# Altium PCB ANTS-MotorBoard.PcbDoc (part 3 of 3)
Units mm, origin at the board's own origin, x right, y up, seen from the top; angles counter-clockwise.
Board outline 50 x 50 mm, 2 copper layers (Top Layer, Bottom Layer); 2 components, 10 nets, 26 pads, 0 vias.
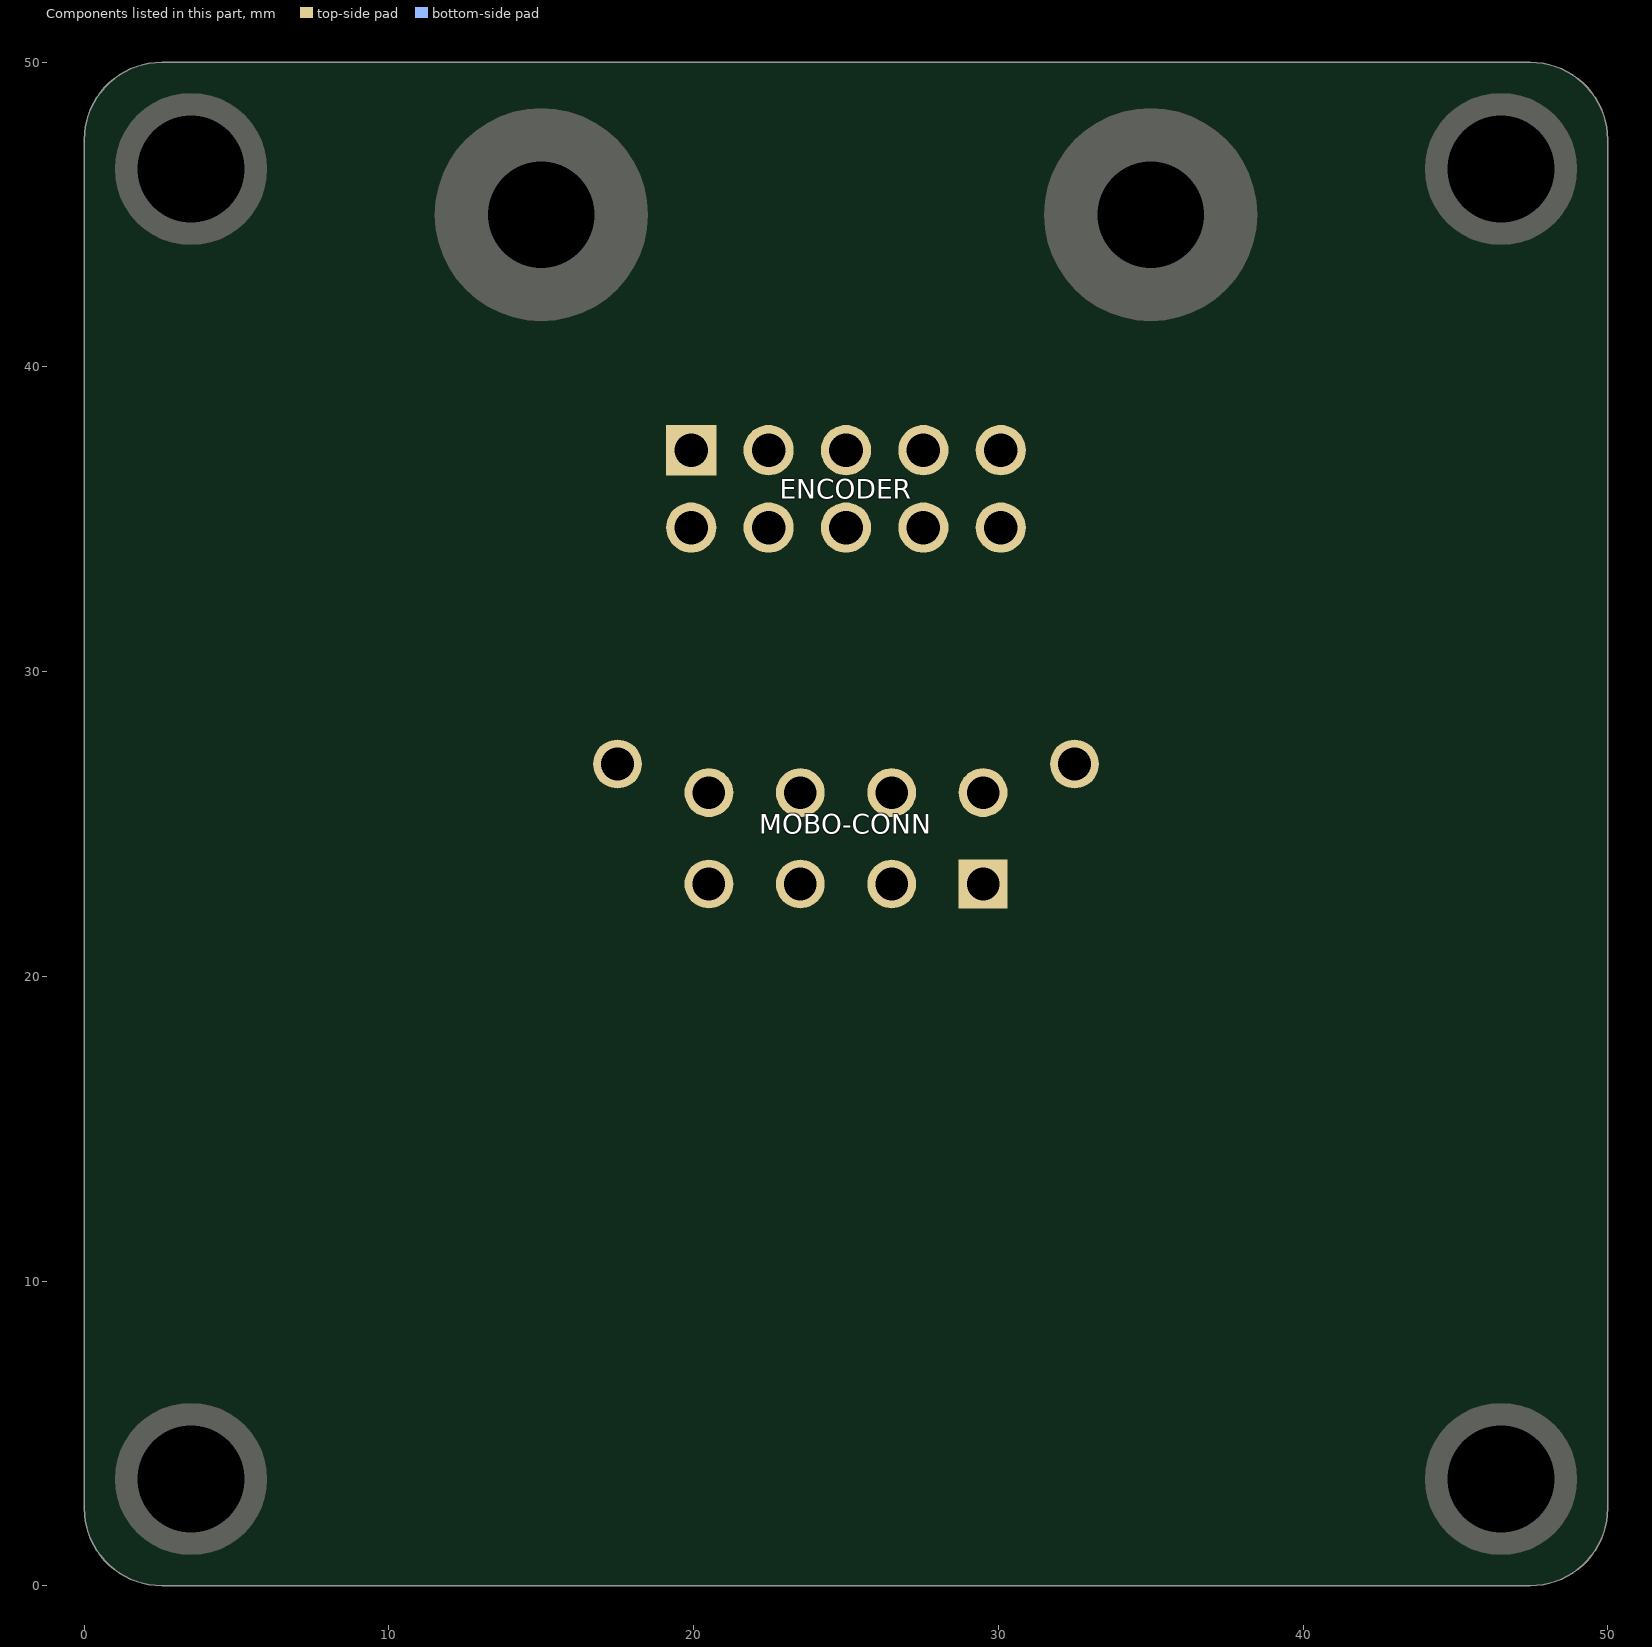
[diagram p3: the components of this part, seen from the top]

## Nets (pads, with @x,y where several pads share a name; then routed paths per layer and width w, separated by ;. In a path a pad name is that pad's centre, name@x,y a point inside that pad or via, vN(x,y) a via of type N, cw(c..) or ccw(c..) an arc to the next point about the centre after c; other vN are vias at no path point) (continued)
copper on no net: (continued)
  Top Layer w0.025: 27.892,2.794 28.223,2.794 ; 27.892,2.819 28.248,2.819 ; 27.892,8.509 28.832,8.509 ; 27.892,10.109 28.527,10.109 ; 27.892,10.135 28.527,10.135 ; 27.892,10.16 28.502,10.16 ; 27.892,10.185 28.502,10.185 ; 27.892,10.211 28.477,10.211 ; 27.892,10.236 28.477,10.236 ; 27.892,10.262 28.477,10.262 ; 27.892,10.287 28.451,10.287 ; 27.892,10.312 28.451,10.312 ; 27.918,2.057 28.35,2.057 ; 27.918,2.083 28.273,2.083 ; 27.918,2.845 28.299,2.845 ; 27.918,2.87 28.4,2.87 ; 27.918,8.484 28.832,8.484 ; 27.918,10.338 28.451,10.338 ; 27.918,10.363 28.451,10.363 ; 27.918,10.389 28.451,10.389 ; 27.918,10.414 28.451,10.414 ; 27.918,10.439 28.451,10.439 ; 27.943,2.007 29.086,2.007 ; 27.943,2.032 29.112,2.032 ; 27.943,2.896 29.086,2.896 ; 27.943,8.433 28.832,8.433 ; 27.943,8.458 28.832,8.458 ; 27.943,10.465 28.426,10.465 ; 27.943,10.49 28.426,10.49 ; 27.943,10.516 28.4,10.516 ; 27.943,10.541 28.4,10.541 ; 27.943,10.566 28.4,10.566 ; 27.943,10.592 28.4,10.592 ; 27.943,10.617 28.4,10.617 ; 27.943,10.643 28.4,10.643 ; 27.969,1.981 29.061,1.981 ; 27.969,2.921 29.086,2.921 ; 27.969,8.407 28.832,8.407 ; 27.994,1.956 29.035,1.956 ; 27.994,2.946 29.061,2.946 ; 27.994,2.972 29.035,2.972 ; 27.994,8.382 28.858,8.382 ; 28.019,1.93 29.01,1.93 ; 28.019,8.357 28.858,8.357 ; 28.019,12.573 28.35,12.573 ; 28.019,12.598 28.273,12.598 ; 28.019,12.624 28.197,12.624 ; 28.045,1.905 28.985,1.905 ; 28.045,2.997 29.01,2.997 ; 28.045,8.306 28.858,8.306 ; 28.045,8.331 28.858,8.331 ; 28.045,12.497 28.604,12.497 ; 28.045,12.522 28.502,12.522 ; 28.045,12.548 28.426,12.548 ; 28.045,12.649 28.096,12.649 ; 28.07,3.023 28.959,3.023 ; 28.07,8.28 28.858,8.28 ; 28.07,12.344 28.756,12.344 ; 28.07,12.37 28.756,12.37 ; 28.07,12.395 28.756,12.395 ; 28.07,12.421 28.756,12.421 ; 28.07,12.446 28.756,12.446 ; 28.07,12.471 28.68,12.471 ; 28.096,1.88 28.959,1.88 ; 28.096,3.048 28.934,3.048 ; 28.096,8.255 28.858,8.255 ; 28.096,12.294 28.781,12.294 ; 28.096,12.319 28.756,12.319 ; 28.121,1.854 28.908,1.854 ; 28.121,8.23 28.858,8.23 ; 28.121,12.192 28.807,12.192 ; 28.121,12.217 28.807,12.217 ; 28.121,12.243 28.781,12.243 ; 28.121,12.268 28.781,12.268 ; 28.146,3.073 28.883,3.073 ; 28.146,8.179 28.883,8.179 ; 28.146,8.204 28.858,8.204 ; 28.146,12.04 28.832,12.04 ; 28.146,12.065 28.832,12.065 ; 28.146,12.09 28.832,12.09 ; 28.146,12.116 28.832,12.116 ; 28.146,12.141 28.807,12.141 ; 28.146,12.167 28.807,12.167 ; 28.172,8.153 28.883,8.153 ; 28.172,11.963 28.858,11.963 ; 28.172,11.989 28.858,11.989 ; 28.172,12.014 28.832,12.014 ; 28.197,1.829 28.858,1.829 ; 28.197,8.128 28.883,8.128 ; 28.197,11.811 28.883,11.811 ; 28.197,11.836 28.883,11.836 ; 28.197,11.862 28.883,11.862 ; 28.197,11.887 28.883,11.887 ; 28.197,11.913 28.858,11.913 ; 28.197,11.938 28.858,11.938 ; 28.223,3.099 28.832,3.099 ; 28.223,8.077 28.883,8.077 ; 28.223,8.103 28.883,8.103 ; 28.223,11.76 28.908,11.76 ; 28.223,11.786 28.908,11.786 ; 28.248,8.052 28.883,8.052 ; 28.248,11.608 28.934,11.608 ; 28.248,11.633 28.934,11.633 ; 28.248,11.659 28.934,11.659 ; 28.248,11.684 28.934,11.684 ; 28.248,11.709 28.908,11.709 ; 28.248,11.735 28.908,11.735 ; 28.273,1.803 28.781,1.803 ; 28.273,8.001 28.883,8.001 ; 28.273,8.026 28.883,8.026 ; 28.273,11.532 28.959,11.532 ; 28.273,11.557 28.959,11.557 ; 28.273,11.582 28.959,11.582 ; 28.299,3.124 28.731,3.124 ; 28.299,7.976 28.883,7.976 ; 28.299,11.455 28.985,11.455 ; 28.299,11.481 28.959,11.481 ; 28.299,11.506 28.959,11.506 ; 28.324,11.303 29.01,11.303 ; 28.324,11.328 29.01,11.328 ; 28.324,11.354 29.01,11.354 ; 28.324,11.379 28.985,11.379 ; 28.324,11.405 28.985,11.405 ; 28.324,11.43 28.985,11.43 ; 28.35,7.925 28.883,7.925 ; 28.35,7.95 28.883,7.95 ; 28.35,11.227 29.01,11.227 ; 28.35,11.252 29.01,11.252 ; 28.35,11.278 29.01,11.278 ; 28.375,7.874 28.883,7.874 ; 28.375,7.899 28.883,7.899 ; 28.375,11.074 29.061,11.074 ; 28.375,11.1 29.061,11.1 ; 28.375,11.125 29.061,11.125 ; 28.375,11.151 29.035,11.151 ; 28.375,11.176 29.035,11.176 ; 28.375,11.201 29.035,11.201 ; 28.4,7.849 28.883,7.849 ; 28.4,11.024 29.061,11.024 ; 28.4,11.049 29.061,11.049 ; 28.426,7.823 28.908,7.823 ; 28.426,10.871 29.086,10.871 ; 28.426,10.897 29.086,10.897 ; 28.426,10.922 29.086,10.922 ; 28.426,10.947 29.086,10.947 ; 28.426,10.973 29.086,10.973 ; 28.426,10.998 29.061,10.998 ; 28.451,7.798 28.908,7.798 ; 28.451,10.795 29.112,10.795 ; 28.451,10.82 29.112,10.82 ; 28.451,10.846 29.112,10.846 ; 28.477,7.747 28.908,7.747 ; 28.477,7.772 28.908,7.772 ; 28.477,10.719 29.137,10.719 ; 28.477,10.744 29.137,10.744 ; 28.477,10.77 29.112,10.77 ; 28.502,7.722 28.908,7.722 ; 28.502,10.566 29.162,10.566 ; 28.502,10.592 29.162,10.592 ; 28.502,10.617 29.162,10.617 ; 28.502,10.643 29.137,10.643 ; 28.502,10.668 29.137,10.668 ; 28.502,10.693 29.137,10.693 ; 28.527,7.696 28.908,7.696 ; 28.527,10.465 29.188,10.465 ; 28.527,10.49 29.188,10.49 ; 28.527,10.516 29.188,10.516 ; 28.527,10.541 29.162,10.541 ; 28.553,7.671 28.908,7.671 ; 28.553,10.363 29.188,10.363 ; 28.553,10.389 29.188,10.389 ; 28.553,10.414 29.188,10.414 ; 28.553,10.439 29.188,10.439 ; 28.578,7.62 28.934,7.62 ; 28.578,7.645 28.934,7.645 ; 28.578,10.287 29.213,10.287 ; 28.578,10.312 29.213,10.312 ; 28.578,10.338 29.213,10.338 ; 28.604,7.595 28.934,7.595 ; 28.604,10.135 29.239,10.135 ; 28.604,10.211 29.239,10.211 ; 28.604,10.236 29.239,10.236 ; 28.604,10.262 29.239,10.262 ; 28.629,7.569 28.934,7.569 ; 28.629,10.033 29.264,10.033 ; 28.629,10.058 29.264,10.058 ; 28.629,10.084 29.264,10.084 ; 28.629,10.109 29.239,10.109 ; 28.629,10.16 29.239,10.16 ; 28.629,10.185 29.239,10.185 ; 28.654,2.87 29.112,2.87 ; 28.654,7.544 28.934,7.544 ; 28.654,9.982 29.289,9.982 ; 28.654,10.008 29.264,10.008 ; 28.68,2.057 29.112,2.057 ; 28.68,7.493 28.934,7.493 ; 28.68,7.518 28.934,7.518 ; 28.68,9.83 29.315,9.83 ; 28.68,9.855 29.315,9.855 ; 28.68,9.881 29.315,9.881 ; 28.68,9.906 29.289,9.906 ; 28.68,9.931 29.289,9.931 ; 28.68,9.957 29.289,9.957 ; 28.705,7.468 28.934,7.468 ; 28.705,9.779 29.315,9.779 ; 28.705,9.804 29.315,9.804 ; 28.731,2.845 29.137,2.845 ; 28.731,7.442 28.934,7.442 ; 28.731,9.627 29.366,9.627 ; 28.731,9.652 29.34,9.652 ; 28.731,9.677 29.34,9.677 ; 28.731,9.703 29.34,9.703 ; 28.731,9.728 29.34,9.728 ; 28.731,9.754 29.315,9.754 ; 28.756,2.083 29.137,2.083 ; 28.756,7.417 28.934,7.417 ; 28.756,9.55 29.366,9.55 ; 28.756,9.576 29.366,9.576 ; 28.756,9.601 29.366,9.601 ; 28.781,2.819 29.137,2.819 ; 28.781,7.366 28.934,7.366 ; 28.781,7.391 28.934,7.391 ; 28.781,9.474 29.366,9.474 ; 28.781,9.5 29.366,9.5 ; 28.781,9.525 29.366,9.525 ; 28.807,2.108 29.137,2.108 ; 28.807,7.341 28.959,7.341 ; 28.807,9.296 29.416,9.296 ; 28.807,9.322 29.416,9.322 ; 28.807,9.347 29.416,9.347 ; 28.807,9.373 29.391,9.373 ; 28.807,9.398 29.391,9.398 ; 28.807,9.423 29.391,9.423 ; 28.807,9.449 29.391,9.449 ; 28.832,2.134 29.162,2.134 ; 28.832,2.794 29.137,2.794 ; 28.832,7.315 28.959,7.315 ; 28.832,9.271 29.442,9.271 ; 28.858,2.159 29.162,2.159 ; 28.858,2.769 29.162,2.769 ; 28.858,7.264 28.959,7.264 ; 28.858,7.29 28.959,7.29 ; 28.858,9.093 29.467,9.093 ; 28.858,9.119 29.467,9.119 ; 28.858,9.144 29.442,9.144 ; 28.858,9.169 29.442,9.169 ; 28.858,9.195 29.442,9.195 ; 28.858,9.22 29.442,9.22 ; 28.858,9.246 29.442,9.246 ; 28.883,2.184 29.162,2.184 ; 28.883,2.21 29.188,2.21 ; 28.883,2.718 29.188,2.718 ; 28.883,2.743 29.162,2.743 ; 28.883,7.239 28.959,7.239 ; 28.883,9.042 29.467,9.042 ; 28.883,9.068 29.467,9.068 ; 28.908,2.235 29.188,2.235 ; 28.908,2.261 29.188,2.261 ; 28.908,2.667 29.188,2.667 ; 28.908,2.692 29.188,2.692 ; 28.908,8.89 29.493,8.89 ; 28.908,8.915 29.493,8.915 ; 28.908,8.941 29.493,8.941 ; 28.908,8.966 29.493,8.966 ; 28.908,8.992 29.493,8.992 ; 28.908,9.017 29.467,9.017 ; 28.934,2.286 29.188,2.286 ; 28.934,2.311 29.188,2.311 ; 28.934,2.337 29.188,2.337 ; 28.934,2.362 29.213,2.362 ; 28.934,2.388 29.213,2.388 ; 28.934,2.413 29.213,2.413 ; 28.934,2.438 29.213,2.438 ; 28.934,2.464 29.213,2.464 ; 28.934,2.489 29.213,2.489 ; 28.934,2.515 29.213,2.515 ; 28.934,2.54 29.213,2.54 ; 28.934,2.565 29.213,2.565 ; 28.934,2.591 29.188,2.591 ; 28.934,2.616 29.188,2.616 ; 28.934,2.642 29.188,2.642 ; 28.934,8.509 29.493,8.509 ; 28.934,8.534 29.493,8.534 ; 28.934,8.56 29.493,8.56 ; 28.934,8.585 29.493,8.585 ; 28.934,8.611 29.493,8.611 ; 28.934,8.636 29.493,8.636 ; 28.934,8.661 29.493,8.661 ; 28.934,8.687 29.493,8.687 ; 28.934,8.712 29.493,8.712 ; 28.934,8.738 29.493,8.738 ; 28.934,8.763 29.493,8.763 ; 28.934,8.788 29.493,8.788 ; 28.934,8.814 29.493,8.814 ; 28.934,8.839 29.493,8.839 ; 28.934,8.865 29.493,8.865 ; 28.959,8.407 29.493,8.407 ; 28.959,8.433 29.493,8.433 ; 28.959,8.458 29.493,8.458 ; 28.959,8.484 29.493,8.484 ; 28.985,7.95 29.493,7.95 ; 28.985,7.976 29.493,7.976 ; 28.985,8.001 29.493,8.001 ; 28.985,8.026 29.493,8.026 ; 28.985,8.052 29.493,8.052 ; 28.985,8.077 29.493,8.077 ; 28.985,8.103 29.493,8.103 ; 28.985,8.128 29.493,8.128 ; 28.985,8.153 29.493,8.153 ; 28.985,8.179 29.493,8.179 ; 28.985,8.204 29.493,8.204 ; 28.985,8.23 29.493,8.23 ; 28.985,8.255 29.493,8.255 ; 28.985,8.28 29.493,8.28 ; 28.985,8.306 29.493,8.306 ; 28.985,8.331 29.493,8.331 ; 28.985,8.357 29.493,8.357 ; 28.985,8.382 29.493,8.382 ; 29.01,7.823 29.493,7.823 ; 29.01,7.849 29.493,7.849 ; 29.01,7.874 29.493,7.874 ; 29.01,7.899 29.493,7.899 ; 29.01,7.925 29.493,7.925 ; 29.035,7.544 29.543,7.544 ; 29.035,7.569 29.543,7.569 ; 29.035,7.595 29.543,7.595 ; 29.035,7.62 29.518,7.62 ; 29.035,7.645 29.518,7.645 ; 29.035,7.671 29.518,7.671 ; 29.035,7.696 29.518,7.696 ; 29.035,7.722 29.518,7.722 ; 29.035,7.747 29.518,7.747 ; 29.035,7.772 29.518,7.772 ; 29.035,7.798 29.518,7.798 ; 29.061,7.239 29.543,7.239 ; 29.061,7.264 29.543,7.264 ; 29.061,7.29 29.543,7.29 ; 29.061,7.315 29.543,7.315 ; 29.061,7.341 29.543,7.341 ; 29.061,7.366 29.543,7.366 ; 29.061,7.391 29.543,7.391 ; 29.061,7.417 29.543,7.417 ; 29.061,7.442 29.543,7.442 ; 29.061,7.468 29.543,7.468 ; 29.061,7.493 29.543,7.493 ; 29.061,7.518 29.518,7.518 ; 29.086,7.188 29.543,7.188 ; 29.086,7.214 29.543,7.214 ; 29.112,6.731 29.543,6.731 ; 29.112,6.756 29.543,6.756 ; 29.112,6.782 29.543,6.782 ; 29.112,6.807 29.543,6.807 ; 29.112,6.833 29.543,6.833 ; 29.112,6.858 29.543,6.858 ; 29.112,6.883 29.543,6.883 ; 29.112,6.909 29.543,6.909 ; 29.112,6.934 29.543,6.934 ; 29.112,6.96 29.543,6.96 ; 29.112,6.985 29.543,6.985 ; 29.112,7.01 29.543,7.01 ; 29.112,7.036 29.543,7.036 ; 29.112,7.061 29.543,7.061 ; 29.112,7.087 29.543,7.087 ; 29.112,7.112 29.543,7.112 ; 29.112,7.137 29.543,7.137 ; 29.112,7.163 29.543,7.163 ; 29.137,6.579 29.569,6.579 ; 29.137,6.604 29.569,6.604 ; 29.137,6.629 29.543,6.629 ; 29.137,6.655 29.543,6.655 ; 29.137,6.68 29.543,6.68 ; 29.137,6.706 29.543,6.706 ; 29.162,6.198 29.569,6.198 ; 29.162,6.223 29.569,6.223 ; 29.162,6.248 29.569,6.248 ; 29.162,6.274 29.569,6.274 ; 29.162,6.299 29.569,6.299 ; 29.162,6.325 29.569,6.325 ; 29.162,6.35 29.569,6.35 ; 29.162,6.375 29.569,6.375 ; 29.162,6.401 29.569,6.401 ; 29.162,6.426 29.569,6.426 ; 29.162,6.452 29.569,6.452 ; 29.162,6.477 29.569,6.477 ; 29.162,6.502 29.569,6.502 ; 29.162,6.528 29.569,6.528 ; 29.162,6.553 29.569,6.553 ; 29.162,11.151 29.797,11.151 ; 29.162,11.176 29.67,11.176 ; 29.162,11.201 29.594,11.201 ; 29.162,11.227 29.493,11.227 ; 29.162,11.252 29.416,11.252 ; 29.162,11.278 29.34,11.278 ; 29.162,11.303 29.239,11.303 ; 29.188,6.02 29.569,6.02 ; 29.188,6.045 29.569,6.045 ; 29.188,6.071 29.569,6.071 ; 29.188,6.096 29.569,6.096 ; 29.188,6.121 29.569,6.121 ; 29.188,6.147 29.569,6.147 ; 29.188,6.172 29.569,6.172 ; 29.188,11.024 30.204,11.024 ; 29.188,11.049 30.128,11.049 ; 29.188,11.074 30.001,11.074 ; 29.188,11.1 29.95,11.1 ; 29.188,11.125 29.848,11.125 ; 29.213,5.74 29.594,5.74 ; 29.213,5.766 29.594,5.766 ; 29.213,5.791 29.594,5.791 ; 29.213,5.867 29.569,5.867 ; 29.213,5.893 29.569,5.893 ; 29.213,5.918 29.569,5.918 ; 29.213,5.944 29.569,5.944 ; 29.213,5.969 29.569,5.969 ; 29.213,5.994 29.569,5.994 ; 29.213,10.947 30.458,10.947 ; 29.213,10.973 30.382,10.973 ; 29.213,10.998 30.28,10.998 ; 29.239,5.436 29.594,5.436 ; 29.239,5.461 29.594,5.461 ; 29.239,5.486 29.594,5.486 ; 29.239,5.512 29.594,5.512 ; 29.239,5.537 29.594,5.537 ; 29.239,5.563 29.594,5.563 ; 29.239,5.588 29.594,5.588 ; 29.239,5.613 29.594,5.613 ; 29.239,5.639 29.594,5.639 ; 29.239,5.664 29.594,5.664 ; 29.239,5.69 29.594,5.69 ; 29.239,5.715 29.594,5.715 ; 29.239,5.817 29.594,5.817 ; 29.239,5.842 29.594,5.842 ; 29.239,10.719 30.991,10.719 ; 29.239,10.744 30.991,10.744 ; 29.239,10.77 30.966,10.77 ; 29.239,10.795 30.94,10.795 ; 29.239,10.82 30.89,10.82 ; 29.239,10.846 30.813,10.846 ; 29.239,10.871 30.686,10.871 ; 29.239,10.897 30.636,10.897 ; 29.239,10.922 30.534,10.922 ; 29.264,5.359 29.62,5.359 ; 29.264,5.385 29.62,5.385 ; 29.264,5.41 29.62,5.41 ; 29.264,10.668 31.042,10.668 ; 29.264,10.693 31.017,10.693 ; 29.289,4.978 29.645,4.978 ; 29.289,5.004 29.645,5.004 ; 29.289,5.029 29.62,5.029 ; 29.289,5.055 29.62,5.055 ; 29.289,5.08 29.62,5.08 ; 29.289,5.105 29.62,5.105 ; 29.289,5.131 29.62,5.131 ; 29.289,5.156 29.62,5.156 ; 29.289,5.182 29.62,5.182 ; 29.289,5.207 29.62,5.207 ; 29.289,5.232 29.62,5.232 ; 29.289,5.258 29.62,5.258 ; 29.289,5.283 29.62,5.283 ; 29.289,5.309 29.62,5.309 ; 29.289,5.334 29.62,5.334 ; 29.289,10.49 31.169,10.49 ; 29.289,10.516 31.169,10.516 ; 29.289,10.541 31.144,10.541 ; 29.289,10.566 31.118,10.566 ; 29.289,10.592 31.093,10.592 ; 29.289,10.617 31.067,10.617 ; 29.289,10.643 31.042,10.643 ; 29.315,4.928 29.67,4.928 ; 29.315,4.953 29.67,4.953 ; 29.315,10.389 31.245,10.389 ; 29.315,10.414 31.245,10.414 ; 29.315,10.439 31.22,10.439 ; 29.315,10.465 31.194,10.465 ; 29.34,4.902 29.67,4.902 ; 29.34,10.287 31.347,10.287 ; 29.34,10.312 31.321,10.312 ; 29.34,10.338 31.296,10.338 ; 29.34,10.363 31.271,10.363 ; 29.366,4.851 29.696,4.851 ; 29.366,4.877 29.696,4.877 ; 29.366,10.109 31.474,10.109 ; 29.366,10.135 31.448,10.135 ; 29.366,10.16 31.423,10.16 ; 29.366,10.185 31.423,10.185 ; 29.366,10.211 31.398,10.211 ; 29.366,10.236 31.372,10.236 ; 29.366,10.262 31.372,10.262 ; 29.391,2.896 30.813,2.896 ; 29.391,2.921 30.813,2.921 ; 29.391,2.946 30.813,2.946 ; 29.391,2.972 30.813,2.972 ; 29.391,2.997 30.813,2.997 ; 29.391,3.023 30.813,3.023 ; 29.391,3.048 30.813,3.048 ; 29.391,3.073 30.813,3.073 ; 29.391,3.099 30.813,3.099 ; 29.391,3.124 30.813,3.124 ; 29.391,4.826 29.721,4.826 ; 29.391,10.033 31.525,10.033 ; 29.391,10.058 31.499,10.058 ; 29.391,10.084 31.474,10.084 ; 29.416,4.775 29.747,4.775 ; 29.416,4.801 29.721,4.801 ; 29.416,9.83 31.677,9.83 ; 29.416,9.855 31.677,9.855 ; 29.416,9.881 31.652,9.881 ; 29.416,9.906 31.626,9.906 ; 29.416,9.931 31.601,9.931 ; 29.416,9.957 31.601,9.957 ; 29.416,9.982 31.575,9.982 ; 29.416,10.008 31.55,10.008 ; 29.442,4.75 29.747,4.75 ; 29.442,9.754 31.753,9.754 ; 29.442,9.779 31.728,9.779 ; 29.442,9.804 31.702,9.804 ; 29.467,4.699 29.772,4.699 ; 29.467,4.724 29.772,4.724 ; 29.467,9.576 31.88,9.576 ; 29.467,9.601 31.855,9.601 ; 29.467,9.627 31.855,9.627 ; 29.467,9.652 31.829,9.652 ; 29.467,9.677 31.804,9.677 ; 29.467,9.703 31.804,9.703 ; 29.467,9.728 31.779,9.728 ; 29.493,4.674 29.797,4.674 ; 29.493,9.5 31.956,9.5 ; 29.493,9.525 31.931,9.525 ; 29.493,9.55 31.906,9.55 ; 29.518,4.648 29.797,4.648 ; 29.518,9.423 32.007,9.423 ; 29.518,9.449 31.982,9.449 ; 29.518,9.474 31.956,9.474 ; 29.543,4.597 29.823,4.597 ; 29.543,4.623 29.823,4.623 ; 29.543,9.22 32.16,9.22 ; 29.543,9.246 32.134,9.246 ; 29.543,9.271 32.109,9.271 ; 29.543,9.296 32.083,9.296 ; 29.543,9.322 32.083,9.322 ; 29.543,9.347 32.058,9.347 ; 29.543,9.373 32.033,9.373 ; 29.543,9.398 32.007,9.398 ; 29.569,4.572 29.848,4.572 ; 29.569,9.169 32.21,9.169 ; 29.569,9.195 32.185,9.195 ; 29.594,4.521 29.874,4.521 ; 29.594,4.547 29.848,4.547 ; 29.594,8.509 32.693,8.509 ; 29.594,8.534 32.668,8.534 ; 29.594,8.56 32.668,8.56 ; 29.594,8.585 32.642,8.585 ; 29.594,8.611 32.642,8.611 ; 29.594,8.636 32.617,8.636 ; 29.594,8.661 32.591,8.661 ; 29.594,8.687 32.566,8.687 ; 29.594,8.712 32.541,8.712 ; 29.594,8.738 32.515,8.738 ; 29.594,8.763 32.49,8.763 ; 29.594,8.788 32.49,8.788 ; 29.594,8.814 32.464,8.814 ; 29.594,8.839 32.439,8.839 ; 29.594,8.865 32.439,8.865 ; 29.594,8.89 32.414,8.89 ; 29.594,8.915 32.388,8.915 ; 29.594,8.941 32.388,8.941 ; 29.594,8.966 32.363,8.966 ; 29.594,8.992 32.337,8.992 ; 29.594,9.017 32.312,9.017 ; 29.594,9.042 32.287,9.042 ; 29.594,9.068 32.287,9.068 ; 29.594,9.093 32.261,9.093 ; 29.594,9.119 32.236,9.119 ; 29.594,9.144 32.21,9.144 ; 29.62,4.496 29.874,4.496 ; 29.62,8.204 32.795,8.204 ; 29.62,8.23 32.82,8.23 ; 29.62,8.255 32.845,8.255 ; 29.62,8.28 32.845,8.28 ; 29.62,8.306 32.845,8.306 ; 29.62,8.331 32.845,8.331 ; 29.62,8.357 32.82,8.357 ; 29.62,8.382 32.795,8.382 ; 29.62,8.407 32.795,8.407 ; 29.62,8.433 32.769,8.433 ; 29.62,8.458 32.744,8.458 ; 29.62,8.484 32.718,8.484 ; 29.645,4.445 29.899,4.445 ; 29.645,4.47 29.874,4.47 ; 29.645,7.645 32.388,7.645 ; 29.645,7.671 32.388,7.671 ; 29.645,7.696 32.414,7.696 ; 29.645,7.722 32.439,7.722 ; 29.645,7.747 32.464,7.747 ; 29.645,7.772 32.464,7.772 ; 29.645,7.798 32.49,7.798 ; 29.645,7.823 32.515,7.823 ; 29.645,7.849 32.515,7.849 ; 29.645,7.874 32.566,7.874 ; 29.645,7.899 32.566,7.899 ; 29.645,7.925 32.591,7.925 ; 29.645,7.95 32.617,7.95 ; 29.645,7.976 32.642,7.976 ; 29.645,8.001 32.642,8.001 ; 29.645,8.026 32.668,8.026 ; 29.645,8.052 32.693,8.052 ; 29.645,8.077 32.693,8.077 ; 29.645,8.103 32.718,8.103 ; 29.645,8.128 32.744,8.128 ; 29.645,8.153 32.769,8.153 ; 29.645,8.179 32.795,8.179 ; 29.67,4.42 29.899,4.42 ; 29.67,6.833 31.728,6.833 ; 29.67,6.858 31.753,6.858 ; 29.67,6.883 31.779,6.883 ; 29.67,6.909 31.804,6.909 ; 29.67,6.934 31.804,6.934 ; 29.67,6.96 31.829,6.96 ; 29.67,6.985 31.855,6.985 ; 29.67,7.01 31.855,7.01 ; 29.67,7.036 31.906,7.036 ; 29.67,7.061 31.931,7.061 ; 29.67,7.087 31.931,7.087 ; 29.67,7.112 31.956,7.112 ; 29.67,7.137 31.982,7.137 ; 29.67,7.163 31.982,7.163 ; 29.67,7.188 32.007,7.188 ; 29.67,7.214 32.033,7.214 ; 29.67,7.239 32.058,7.239 ; 29.67,7.264 32.083,7.264 ; 29.67,7.29 32.083,7.29 ; 29.67,7.315 32.109,7.315 ; 29.67,7.341 32.134,7.341 ; 29.67,7.366 32.16,7.366 ; 29.67,7.391 32.16,7.391 ; 29.67,7.417 32.21,7.417 ; 29.67,7.442 32.21,7.442 ; 29.67,7.468 32.236,7.468 ; 29.67,7.493 32.261,7.493 ; 29.67,7.518 32.261,7.518 ; 29.67,7.544 32.287,7.544 ; 29.67,7.569 32.312,7.569 ; 29.67,7.595 32.337,7.595 ; 29.67,7.62 32.363,7.62 ; 29.696,4.369 29.924,4.369 ; 29.696,4.394 29.924,4.394 ; 29.721,4.343 29.95,4.343 ; 29.747,4.318 29.95,4.318 ; 29.772,4.267 29.975,4.267 ; 29.772,4.293 29.95,4.293 ; 29.797,4.242 29.975,4.242 ; 29.823,4.216 30.001,4.216 ; 29.823,6.807 31.728,6.807 ; 29.848,4.14 30.026,4.14 ; 29.848,4.166 30.026,4.166 ; 29.848,4.191 30.001,4.191 ; 29.899,4.089 30.051,4.089 ; 29.899,4.115 30.051,4.115 ; 29.924,4.039 30.077,4.039 ; 29.924,4.064 30.077,4.064 ; 29.95,1.803 30.204,1.803 ; 29.95,1.829 30.204,1.829 ; 29.95,1.854 30.204,1.854 ; 29.95,1.88 30.204,1.88 ; 29.95,1.905 30.204,1.905 ; 29.95,1.93 30.204,1.93 ; 29.95,1.956 30.204,1.956 ; 29.95,1.981 30.204,1.981 ; 29.95,2.007 30.204,2.007 ; 29.95,2.032 30.204,2.032 ; 29.95,2.057 30.204,2.057 ; 29.95,2.083 30.204,2.083 ; 29.95,2.108 30.204,2.108 ; 29.95,2.134 30.204,2.134 ; 29.95,2.159 30.204,2.159 ; 29.95,2.184 30.204,2.184 ; 29.95,2.21 30.204,2.21 ; 29.95,2.235 30.204,2.235 ; 29.95,2.261 30.204,2.261 ; 29.95,2.286 30.204,2.286 ; 29.95,2.311 30.204,2.311 ; 29.95,2.337 30.204,2.337 ; 29.95,2.362 30.204,2.362 ; 29.95,2.388 30.204,2.388 ; 29.95,2.413 30.204,2.413 ; 29.95,2.438 30.204,2.438 ; 29.95,2.464 30.204,2.464 ; 29.95,2.489 30.204,2.489 ; 29.95,2.515 30.204,2.515 ; 29.95,2.54 30.204,2.54 ; 29.95,2.565 30.204,2.565 ; 29.95,2.591 30.204,2.591 ; 29.95,2.616 30.204,2.616 ; 29.95,2.642 30.204,2.642 ; 29.95,2.667 30.204,2.667 ; 29.95,2.692 30.204,2.692 ; 29.95,2.718 30.204,2.718 ; 29.95,2.743 30.204,2.743 ; 29.95,2.769 30.204,2.769 ; 29.95,2.794 30.204,2.794 ; 29.95,2.819 30.204,2.819 ; 29.95,2.845 30.204,2.845 ; 29.95,2.87 30.204,2.87 ; 29.95,4.013 30.102,4.013 ; 29.975,3.962 30.102,3.962 ; 29.975,3.988 30.102,3.988 ; 30.001,3.937 30.128,3.937 ; 30.026,3.886 30.128,3.886 ; 30.026,3.912 30.128,3.912 ; 30.077,6.782 31.677,6.782 ; 30.229,6.756 31.677,6.756 ; 30.407,6.731 31.652,6.731 ; 30.61,6.706 31.626,6.706 ; 30.763,6.68 31.601,6.68 ; 31.017,1.803 31.271,1.803 ; 31.017,1.829 31.271,1.829 ; 31.017,1.854 31.271,1.854 ; 31.017,1.88 31.271,1.88 ; 31.017,1.905 31.271,1.905 ; 31.017,1.93 31.271,1.93 ; 31.017,1.956 31.271,1.956 ; 31.017,1.981 31.271,1.981 ; 31.017,2.007 31.271,2.007 ; 31.017,2.032 31.271,2.032 ; 31.017,2.057 31.271,2.057 ; 31.017,2.083 31.271,2.083 ; 31.017,2.108 31.271,2.108 ; 31.017,2.134 31.271,2.134 ; 31.017,2.159 31.271,2.159 ; 31.017,2.184 31.271,2.184 ; 31.017,2.21 31.271,2.21 ; 31.017,2.235 31.271,2.235 ; 31.017,2.261 31.271,2.261 ; 31.017,2.286 31.271,2.286 ; 31.017,2.311 31.271,2.311 ; 31.017,2.337 31.271,2.337 ; 31.017,2.362 31.271,2.362 ; 31.017,2.388 31.271,2.388 ; 31.017,2.413 31.271,2.413 ; 31.017,2.438 31.271,2.438 ; 31.017,2.464 31.271,2.464 ; 31.017,2.489 31.271,2.489 ; 31.017,2.515 31.271,2.515 ; 31.017,2.54 31.271,2.54 ; 31.017,2.565 31.271,2.565 ; 31.017,2.591 31.271,2.591 ; 31.017,2.616 31.271,2.616 ; 31.017,2.642 31.271,2.642 ; 31.017,2.667 31.271,2.667 ; 31.017,2.692 31.271,2.692 ; 31.017,2.718 31.271,2.718 ; 31.017,2.743 31.271,2.743 ; 31.017,2.769 31.271,2.769 ; 31.017,2.794 31.271,2.794 ; 31.017,2.819 31.271,2.819 ; 31.017,2.845 31.271,2.845 ; 31.017,2.87 31.271,2.87 ; 31.017,2.896 31.271,2.896 ; 31.017,2.921 31.271,2.921 ; 31.017,2.946 31.271,2.946 ; 31.017,2.972 31.271,2.972 ; 31.017,2.997 31.271,2.997 ; 31.017,3.023 31.271,3.023 ; 31.017,3.048 31.271,3.048 ; 31.017,3.073 31.271,3.073 ; 31.017,3.099 31.271,3.099 ; 31.017,3.124 31.271,3.124 ; 31.017,6.655 31.575,6.655 ; 31.169,6.629 31.55,6.629 ; 31.423,6.604 31.525,6.604 ; 31.448,2.311 31.728,2.311 ; 31.448,2.337 31.728,2.337 ; 31.448,2.362 31.728,2.362 ; 31.448,2.388 31.702,2.388 ; 31.448,2.413 31.702,2.413 ; 31.448,2.438 31.702,2.438 ; 31.448,2.464 31.702,2.464 ; 31.448,2.489 31.702,2.489 ; 31.448,2.515 31.702,2.515 ; 31.448,2.54 31.702,2.54 ; 31.448,2.565 31.728,2.565 ; 31.448,2.591 31.728,2.591 ; 31.474,2.21 31.753,2.21 ; 31.474,2.235 31.753,2.235 ; 31.474,2.261 31.753,2.261 ; 31.474,2.286 31.728,2.286 ; 31.474,2.616 31.728,2.616 ; 31.474,2.642 31.728,2.642 ; 31.474,2.667 31.753,2.667 ; 31.474,2.692 31.753,2.692 ; 31.474,2.718 31.779,2.718 ; 31.499,2.134 31.829,2.134 ; 31.499,2.159 31.804,2.159 ; 31.499,2.184 31.779,2.184 ; 31.499,2.743 31.779,2.743 ; 31.499,2.769 31.804,2.769 ; 31.499,2.794 31.829,2.794 ; 31.525,2.083 31.906,2.083 ; 31.525,2.108 31.855,2.108 ; 31.525,2.819 31.88,2.819 ; 31.525,2.845 31.931,2.845 ; 31.55,2.032 32.82,2.032 ; 31.55,2.057 31.956,2.057 ; 31.55,2.87 32.007,2.87 ; 31.575,2.007 32.82,2.007 ; 31.575,2.896 32.82,2.896 ; 31.575,2.921 32.82,2.921 ; 31.601,1.981 32.82,1.981 ; 31.601,2.946 32.82,2.946 ; 31.626,1.956 32.82,1.956 ; 31.626,2.972 32.82,2.972 ; 31.652,1.93 32.82,1.93 ; 31.652,2.997 32.82,2.997 ; 31.677,1.905 32.82,1.905 ; 31.677,3.023 32.82,3.023 ; 31.702,1.88 32.82,1.88 ; 31.728,3.048 32.82,3.048 ; 31.753,1.854 32.82,1.854 ; 31.779,3.073 32.82,3.073 ; 31.804,1.829 32.82,1.829 ; 31.829,3.099 32.82,3.099 ; 31.88,1.803 32.82,1.803 ; 31.906,3.124 32.82,3.124 ; 33.023,1.803 34.014,1.803 ; 33.023,1.829 34.09,1.829 ; 33.023,1.854 34.166,1.854 ; 33.023,1.88 34.192,1.88 ; 33.023,1.905 34.242,1.905 ; 33.023,1.93 34.268,1.93 ; 33.023,1.956 34.293,1.956 ; 33.023,1.981 34.319,1.981 ; 33.023,2.007 34.319,2.007 ; 33.023,2.032 34.344,2.032 ; 33.023,2.438 34.344,2.438 ; 33.023,2.464 34.344,2.464 ; 33.023,2.489 34.319,2.489 ; 33.023,2.515 34.293,2.515 ; 33.023,2.54 34.268,2.54 ; 33.023,2.565 34.242,2.565 ; 33.023,2.591 34.192,2.591 ; 33.023,2.616 34.166,2.616 ; 33.023,2.642 34.09,2.642 ; 33.023,2.667 34.014,2.667 ; 33.023,2.692 33.861,2.692 ; 33.023,2.718 33.277,2.718 ; 33.023,2.743 33.277,2.743 ; 33.023,2.769 33.303,2.769 ; 33.023,2.794 33.328,2.794 ; 33.023,2.819 33.353,2.819 ; 33.049,2.845 33.404,2.845 ; 33.049,2.87 33.531,2.87 ; 33.074,2.896 34.369,2.896 ; 33.074,2.921 34.369,2.921 ; 33.099,2.946 34.369,2.946 ; 33.125,2.972 34.369,2.972 ; 33.15,2.997 34.369,2.997 ; 33.176,3.023 34.369,3.023 ; 33.226,3.048 34.369,3.048 ; 33.277,3.073 34.369,3.073 ; 33.353,3.099 34.369,3.099 ; 33.43,3.124 34.369,3.124 ; 33.938,2.057 34.369,2.057 ; 33.938,2.413 34.369,2.413 ; 34.014,2.083 34.369,2.083 ; 34.014,2.388 34.369,2.388 ; 34.065,2.108 34.369,2.108 ; 34.065,2.362 34.369,2.362 ; 34.09,2.134 34.369,2.134 ; 34.09,2.337 34.369,2.337 ; 34.115,2.159 34.369,2.159 ; 34.115,2.184 34.369,2.184 ; 34.115,2.286 34.369,2.286 ; 34.115,2.311 34.369,2.311 ; 34.141,2.21 34.369,2.21 ; 34.141,2.235 34.369,2.235 ; 34.141,2.261 34.369,2.261

## Polygon pours and split planes (outlines as drawn)
MOTOR-CHB on Top Layer "MOTOR-CHB_L01_P001" (solid, pour order 1): 27.993,29.35 32.5,29.35 32.5,40 30,42.5 30,50 40,50 40,42.5 37,39.5 37,20.55 28.053,20.55
MOTOR-CHA on Top Layer "MOTOR-CHA_L01_P000" (solid, pour order 0): 22.007,29.35 17.5,29.35 17.5,40 20,42.5 20,50 10,50 10,42.5 13,39.5 13,20.55 21.947,20.55
GND on Top Layer "GND_L01_P004" (solid, pour order 4): 0,0 0,50 50,50 50,0
MOTOR-CHB on Bottom Layer "MOTOR-CHB_L02_P003" (solid, pour order 3): 27.995,29.35 32.5,29.35 32.5,40 30,42.5 30,50 40,50 40,42.5 37,39.5 37,20.55 28.055,20.55
GND on Bottom Layer "GND_L02_P005" (solid, pour order 5): 0,0 0,50 50,50 50,0
MOTOR-CHA on Bottom Layer "MOTOR-CHA_L02_P002" (solid, pour order 2): 22.005,29.35 17.5,29.35 17.5,40 20,42.5 20,50 10,50 10,42.5 13,39.5 13,20.55 21.945,20.55

## Keep-outs
Keep-Out Layer:
  the board outline again, w1

## Silkscreen, mask and mechanical layers (free items; w line width, h text height)
Top Overlay:
  lines w0.254: 5.25,7.05 5.25,6.25 ; 6.05,6.25 5.25,6.25 ; 10.95,8.5 7.5,8.5 5.25,6.25
  text "MOTOR 24V+" at 7.2,39.181 h3
  text "MOTOR 24V-" at 27.2,39.181 h3
  text "MOTOR BOARD (REV B1)" at 48.65,12.7 h3 r90
  text "4x M3" at 7.5,8.883 h3
Bottom Overlay:
  lines w0.254: 23.7,38.65 23.7,39.65 26.2,39.65 26.2,38.65
  text "MOTOR 24V+" at 22.8,39.181 h3
  text "MOTOR 24V-" at 42.8,39.181 h3
  text "MOTOR-A" at 16.129,29.05 h2 r90
  text "B" at 25.95,28.9 h2 r180
  text "A" at 23.95,27.6 h2
  text "GND" at 27.129,21.65 h2 r90
  text "+5V" at 24.079,21.55 h2 r90
  text "MOTOR-B" at 33.771,20.65 h2 r270
Top Solder:
  drawing of 2567 lines, arcs and shapes, not listed

## Text inside footprints (layer, text, board x,y; h text height)
ENCODER: Bottom Overlay "10" at 31.81,35.1 h1.02 r180; Bottom Overlay "9" at 31.81,37.8 h1.02 r180; Bottom Overlay "1" at 17.79,37.8 h1.02 r180; Bottom Overlay "2" at 17.49,35.1 h1.02 r180